# EAGLE board example (EAGLE 6.5.0)

Size 20.32 x 50.8 mm. Coordinates in mm from the lower left corner, seen from the top.
Outline: 0,0 20.32,0 20.32,50.8 0,50.8 0,0
Copper layers (1*16): Top 0.035mm / dielectric 1.5mm / Bottom 0.035mm
Design rules "default": minimum track width 10mil, minimum drill 24mil, track to track 8mil, track to pad 8mil, pad to pad 8mil, via to via 8mil, smd to smd 8mil, copper to edge 40mil, drill to drill 8mil, minimum pad ring 10mil, minimum via ring 8mil, stop-mask expansion 4mil, vias tented up to drill 0mil, thermal gap 10mil
Net classes: 0 default: width 0.152 mm, drill 0.3 mm, clearance 0.152 mm

## Footprints (pad centres in the part's own frame; a part is rotated, then mirrored left to right if it is on the bottom)
CAP-0603-MURATA-GMX18 = smd 0.7 x 0.8: 1 -0.725,0; 2 0.725,0
LED-0603 = smd 0.8 x 0.8: A 0,-0.75; C 0,0.75
RES-0603-YAGEO = smd 0.9 x 0.8: 1 -0.85,0; 2 0.85,0
1X20_NOSILK = drill 1.016 pad 1.88 octagon: 1 0,0; 2 0,-2.54; 3 0,-5.08; 4 0,-7.62; 5 0,-10.16; 6 0,-12.7; 7 0,-15.24; 8 0,-17.78; 9 0,-20.32; 10 0,-22.86; 11 0,-25.4; 12 0,-27.94; 13 0,-30.48; 14 0,-33.02; 15 0,-35.56; 16 0,-38.1; 17 0,-40.64; 18 0,-43.18; 19 0,-45.72; 20 0,-48.26
SKSGACE010 = smd 0.625 x 0.575: 1 1.562,-0.838; 2 1.562,0.838; 3 -1.562,-0.838; 4 -1.562,0.838 | smd 0.325 x 0.7: 5 1.712,0; 6 -1.712,0
FCI-MICROUSB-B = smd 0.4 x 1.35: 1 -1.3,4.125; 2 -0.65,4.125; 3 0,4.125; 4 0.65,4.125; 5 1.3,4.125 | smd 1.8 x 1.9: SHIELD1 -3.8,1.45; SHIELD6 3.8,1.45 | smd 2.1 x 1.6: SHIELD2 -3.1,4; SHIELD5 3.1,4 | smd 1.9 x 1.9: SHIELD3 -1.2,1.45; SHIELD4 1.2,1.45
SOT23-5 = smd 0.55 x 1.2: 1 -0.95,-1.3; 2 0,-1.3; 3 0.95,-1.3; 4 0.95,1.3; 5 -0.95,1.3
3.2X2.5MM4PAD = smd 1 x 0.9: 1 -1.075,-0.775; 2 1.075,-0.775; 3 1.075,0.775; 4 -1.075,0.775
ST-LQFP48 = smd 0.3 x 1.2: 1 -2.75,-4.25; 2 -2.25,-4.25; 3 -1.75,-4.25; 4 -1.25,-4.25; 5 -0.75,-4.25; 6 -0.25,-4.25; 7 0.25,-4.25; 8 0.75,-4.25; 9 1.25,-4.25; 10 1.75,-4.25; 11 2.25,-4.25; 12 2.75,-4.25; 25 2.75,4.25; 26 2.25,4.25; 27 1.75,4.25; 28 1.25,4.25; 29 0.75,4.25; 30 0.25,4.25; 31 -0.25,4.25; 32 -0.75,4.25; 33 -1.25,4.25; 34 -1.75,4.25; 35 -2.25,4.25; 36 -2.75,4.25 | smd 1.2 x 0.3: 13 4.25,-2.75; 14 4.25,-2.25; 15 4.25,-1.75; 16 4.25,-1.25; 17 4.25,-0.75; 18 4.25,-0.25; 19 4.25,0.25; 20 4.25,0.75; 21 4.25,1.25; 22 4.25,1.75; 23 4.25,2.25; 24 4.25,2.75; 37 -4.25,2.75; 38 -4.25,2.25; 39 -4.25,1.75; 40 -4.25,1.25; 41 -4.25,0.75; 42 -4.25,0.25; 43 -4.25,-0.25; 44 -4.25,-0.75; 45 -4.25,-1.25; 46 -4.25,-1.75; 47 -4.25,-2.25; 48 -4.25,-2.75
3.2X1.5MM2PAD = smd 1 x 1.8: 1 -1.25,0; 2 1.25,0

## Placement (x,y rotation side)
C1  4.7uF  [CAP-0603-MURATA-GMX18]  12.06,44.45 0 top
C2  2.2uF  [CAP-0603-MURATA-GMX18]  13.21,40.13 0 top
C3  0.1uF  [CAP-0603-MURATA-GMX18]  13.97,6.35 0 top
C4  100nF  [CAP-0603-MURATA-GMX18]  16,28.7 270 top
C5  100nF  [CAP-0603-MURATA-GMX18]  4.32,22.35 90 top
C6  100nF  [CAP-0603-MURATA-GMX18]  6.86,31.24 0 top
C7  [CAP-0603-MURATA-GMX18]  5.59,14.48 90 top
C8  [CAP-0603-MURATA-GMX18]  7.87,14.48 90 top
C10  4.7uF  [CAP-0603-MURATA-GMX18]  -27.94,63.5 0 top  (outside the outline)
C15  [CAP-0603-MURATA-GMX18]  9.65,12.19 90 top
C16  [CAP-0603-MURATA-GMX18]  13.21,14.99 90 top
C19  1uF  [CAP-0603-MURATA-GMX18]  13.97,17.78 270 top
C20  10nF  [CAP-0603-MURATA-GMX18]  12.7,17.78 270 top
L1  [CAP-0603-MURATA-GMX18]  15.24,17.78 270 top
LD1  [LED-0603]  -29.21,52.07 0 top  (outside the outline)
LD2  [LED-0603]  -31.75,52.07 0 top  (outside the outline)
R1  [RES-0603-YAGEO]  -26.67,66.04 0 top  (outside the outline)
R2  10K  [RES-0603-YAGEO]  -31.75,66.04 0 top  (outside the outline)
R3  [RES-0603-YAGEO]  -36.83,66.04 0 top  (outside the outline)
R4  22  [RES-0603-YAGEO]  7.62,41.4 270 top
R5  22  [RES-0603-YAGEO]  6.35,41.4 90 top
R6  1K5  [RES-0603-YAGEO]  5.08,41.4 90 top
R17  10K  [RES-0603-YAGEO]  -35.56,58.42 0 top  (outside the outline)
R18  10K  [RES-0603-YAGEO]  -16.51,63.5 0 top  (outside the outline)
R21  [RES-0603-YAGEO]  11.05,18.03 270 top
U$1  M201X20_NOSILK  [1X20_NOSILK]  1.27,1.27 180 top
U$2  SKSGACE010  [SKSGACE010]  6.35,2.54 90 top
U$3  FCI-MICROUSB-B  [FCI-MICROUSB-B]  10.16,50.8 180 top
U$4  SKSGACE010  [SKSGACE010]  13.97,2.54 90 top
U$5  MCP1824  [SOT23-5]  10.16,41.27 180 top
U$6  M201X20_NOSILK  [1X20_NOSILK]  19.05,1.27 180 top
U$8  CRYSTAL4PAD  [3.2X2.5MM4PAD]  10.67,14.99 180 top
U$9  STM32F30XCXTX  [ST-LQFP48]  10.16,25.4 0 top
Y1  [3.2X1.5MM2PAD]  6.73,16.64 180 top

## Library data of the parts
C1-C8 C10 C15 C16 C19 C20 L1 LD1 LD2 R1-R6 R17 R18 R21 U$1-U$6 U$8 U$9 Y1 = cotton

## Nets
+3V3: C2.1 C4.1 C5.1 C6.1 C10.1 L1.2 R2.2 R6.2 U$1.19 U$5.5 U$6.19 U$9.1 U$9.24 U$9.36 U$9.48
BOOT0: R17.2 U$9.44
GND: C1.2 C2.2 C3.2 C4.2 C5.2 C6.2 C7.1 C8.1 C10.2 C15.1 C16.1 C19.2 C20.2 LD1.C LD2.C R17.1 R18.1 U$1.18 U$1.20 U$2.2 U$2.4 U$2.5 U$2.6 U$3.5 U$3.SHIELD1 U$3.SHIELD2 U$3.SHIELD3 U$3.SHIELD4 U$3.SHIELD5 U$3.SHIELD6 U$4.2 U$4.4 U$4.5 U$4.6 U$5.2 U$6.20 U$8.2 U$8.4 U$9.8 U$9.23 U$9.35 U$9.47
N$1: R21.1 U$9.6
N$2: R4.1 U$3.2
N$3: LD2.A R3.2
N$4: LD1.A R1.2
N$5: R5.1 R6.1 U$3.3
N$6: C16.2 R21.2 U$8.1
N$18: C8.2 U$9.4 Y1.1
N$19: C7.2 U$9.3 Y1.2
N$27: C15.2 U$8.3 U$9.5
NRST: C3.1 U$2.1 U$2.3 U$6.7 U$9.7
PA0-WKUP: U$6.8 U$9.10
PA1: U$6.9 U$9.11
PA2: U$6.10 U$9.12
PA3: U$6.11 U$9.13
PA4: U$6.12 U$9.14
PA5: U$6.13 U$9.15
PA6: U$6.14 U$9.16
PA7: U$6.15 U$9.17
PA8: R1.1 U$1.17 U$9.29
PA9: R3.1 U$1.16 U$9.30
PA10: R2.1 U$1.15 U$4.1 U$4.3 U$9.31
PA11/USB_D-: R4.2 U$9.32
PA12/USB_D+: R5.2 U$9.33
PA13: U$1.14 U$9.34
PA14: U$1.13 U$9.37
PA15: U$1.12 U$9.38
PB0: U$6.16 U$9.18
PB1: U$6.17 U$9.19
PB2/BOOT1: R18.2 U$6.18 U$9.20
PB3: U$1.11 U$9.39
PB4: U$1.10 U$9.40
PB5: U$1.9 U$9.41
PB6: U$1.8 U$9.42
PB7: U$1.7 U$9.43
PB8: U$9.45
PB9: U$9.46
PB10: U$9.21
PB11: U$9.22
PB12: U$9.25
PB13: U$9.26
PB14: U$9.27
PB15: U$9.28
PC13: U$9.2
VDDA: C19.1 C20.1 L1.1 U$9.9
VIN: C1.1 U$3.1 U$5.1 U$5.3

## Tracks (layer width: path | path; a pad name or v marks a point on that pad's centre or on a via)
+3V3  (14 unrouted)
BOOT0  (1 unrouted)
GND  (41 unrouted)
N$1  (1 unrouted)
N$2  (1 unrouted)
N$3  (1 unrouted)
N$4  (1 unrouted)
N$5  (2 unrouted)
N$6  (2 unrouted)
N$18  (2 unrouted)
N$19  (2 unrouted)
N$27  (2 unrouted)
NRST  (4 unrouted)
PA0-WKUP  (1 unrouted)
PA1  (1 unrouted)
PA2  (1 unrouted)
PA3  (1 unrouted)
PA4  (1 unrouted)
PA5  (1 unrouted)
PA6  (1 unrouted)
PA7  (1 unrouted)
PA8  (2 unrouted)
PA9  (2 unrouted)
PA10  (4 unrouted)
PA11/USB_D-  (1 unrouted)
PA12/USB_D+  (1 unrouted)
PA13  (1 unrouted)
PA14  (1 unrouted)
PA15  (1 unrouted)
PB0  (1 unrouted)
PB1  (1 unrouted)
PB2/BOOT1  (2 unrouted)
PB3  (1 unrouted)
PB4  (1 unrouted)
PB5  (1 unrouted)
PB6  (1 unrouted)
PB7  (1 unrouted)
VDDA  (3 unrouted)
VIN  (3 unrouted)